# Altium PCB PCB1.PcbDoc
Units mil, origin at the board's own origin, x right, y up, seen from the top; angles counter-clockwise.
Board outline 3717.32 x 2421.26 mil, 4 copper layers (Top Layer, Layer 2, Layer 3, Bottom Layer), stack 23.756 mil thick; 38 components, 34 nets, 145 pads, 364 vias.
Unrouted connection lines stored in the file: 4.
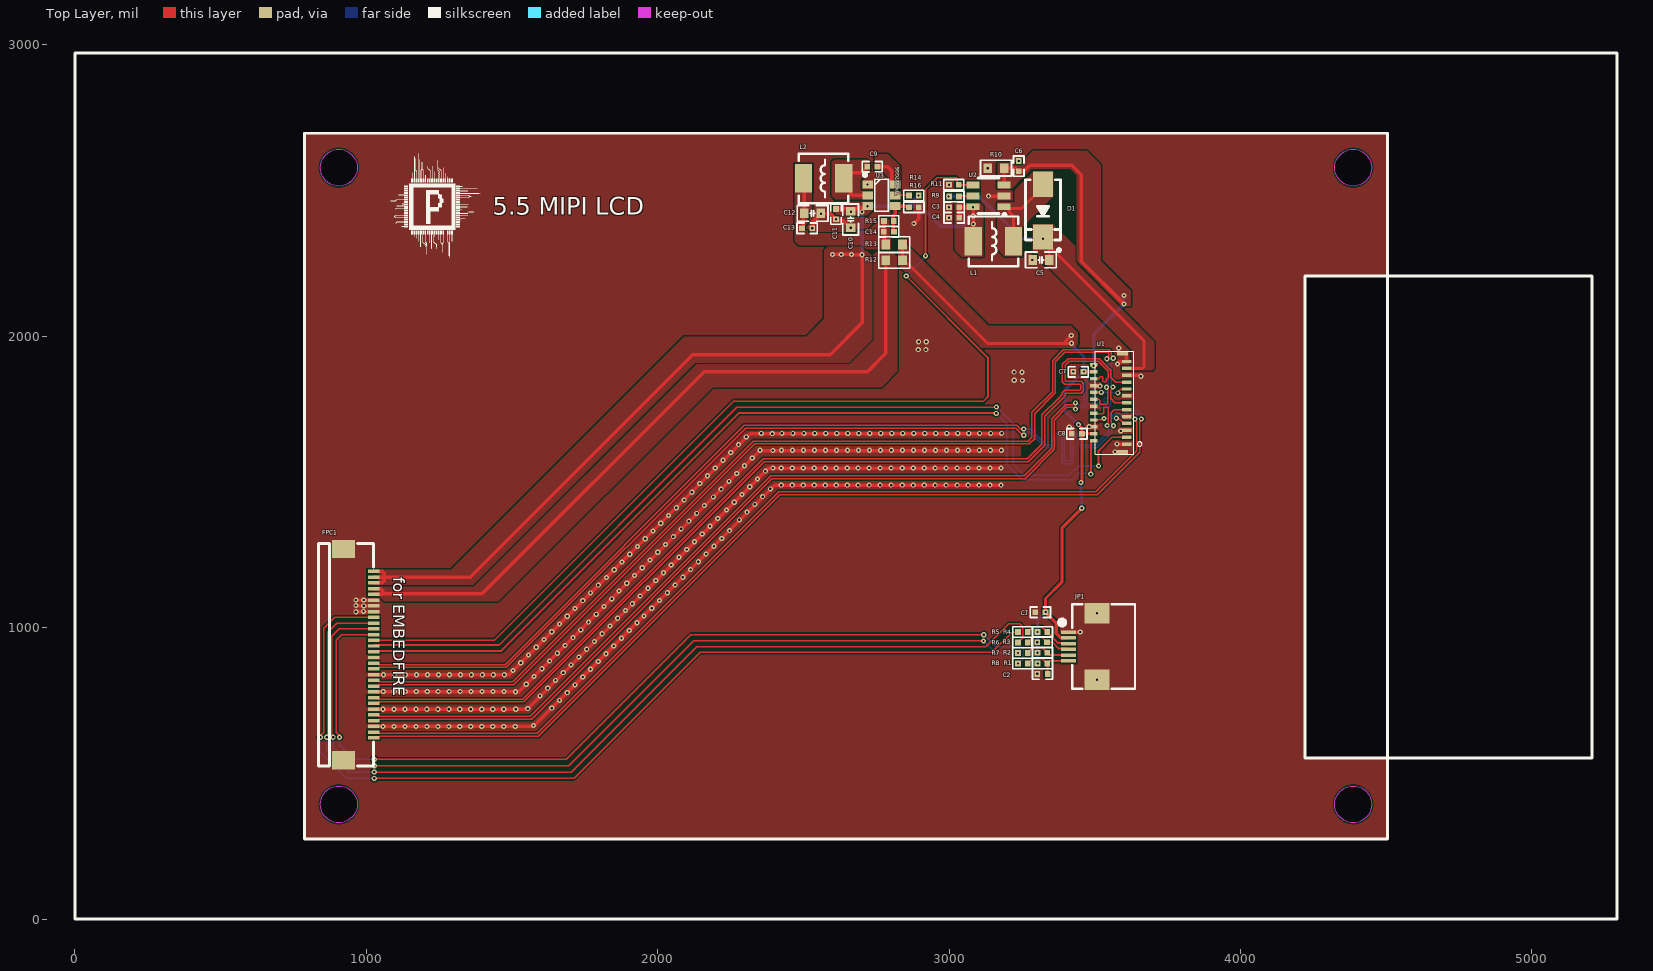
[diagram p0: Top Layer view]
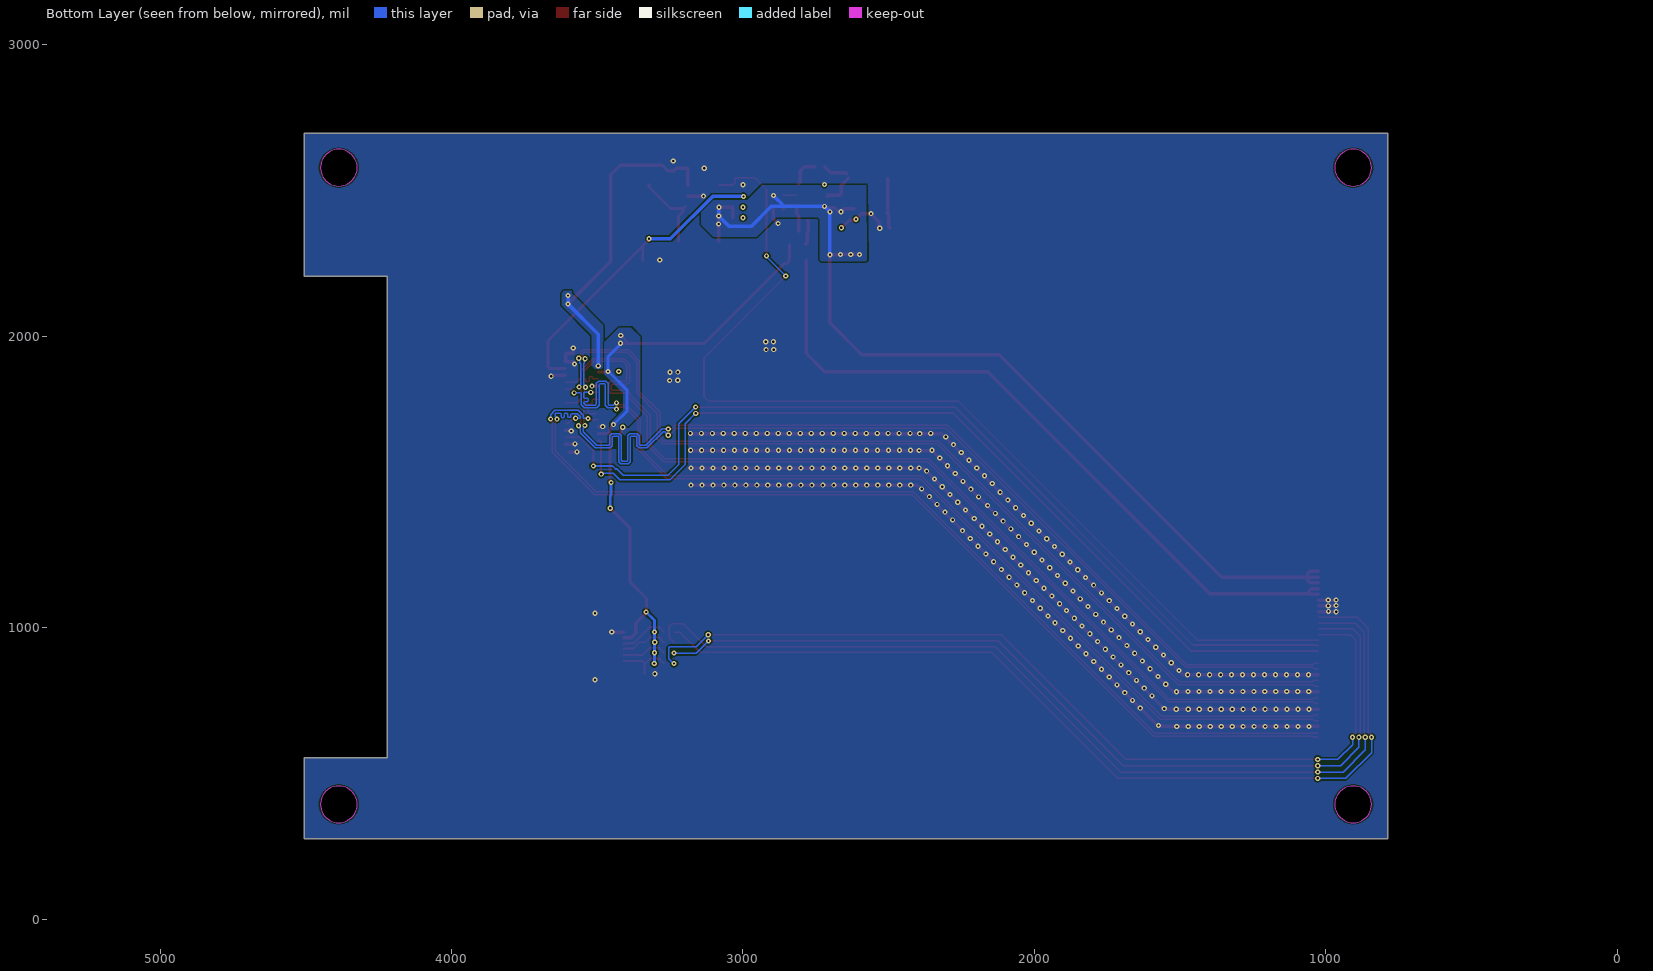
[diagram p1: Bottom Layer view, seen from below]
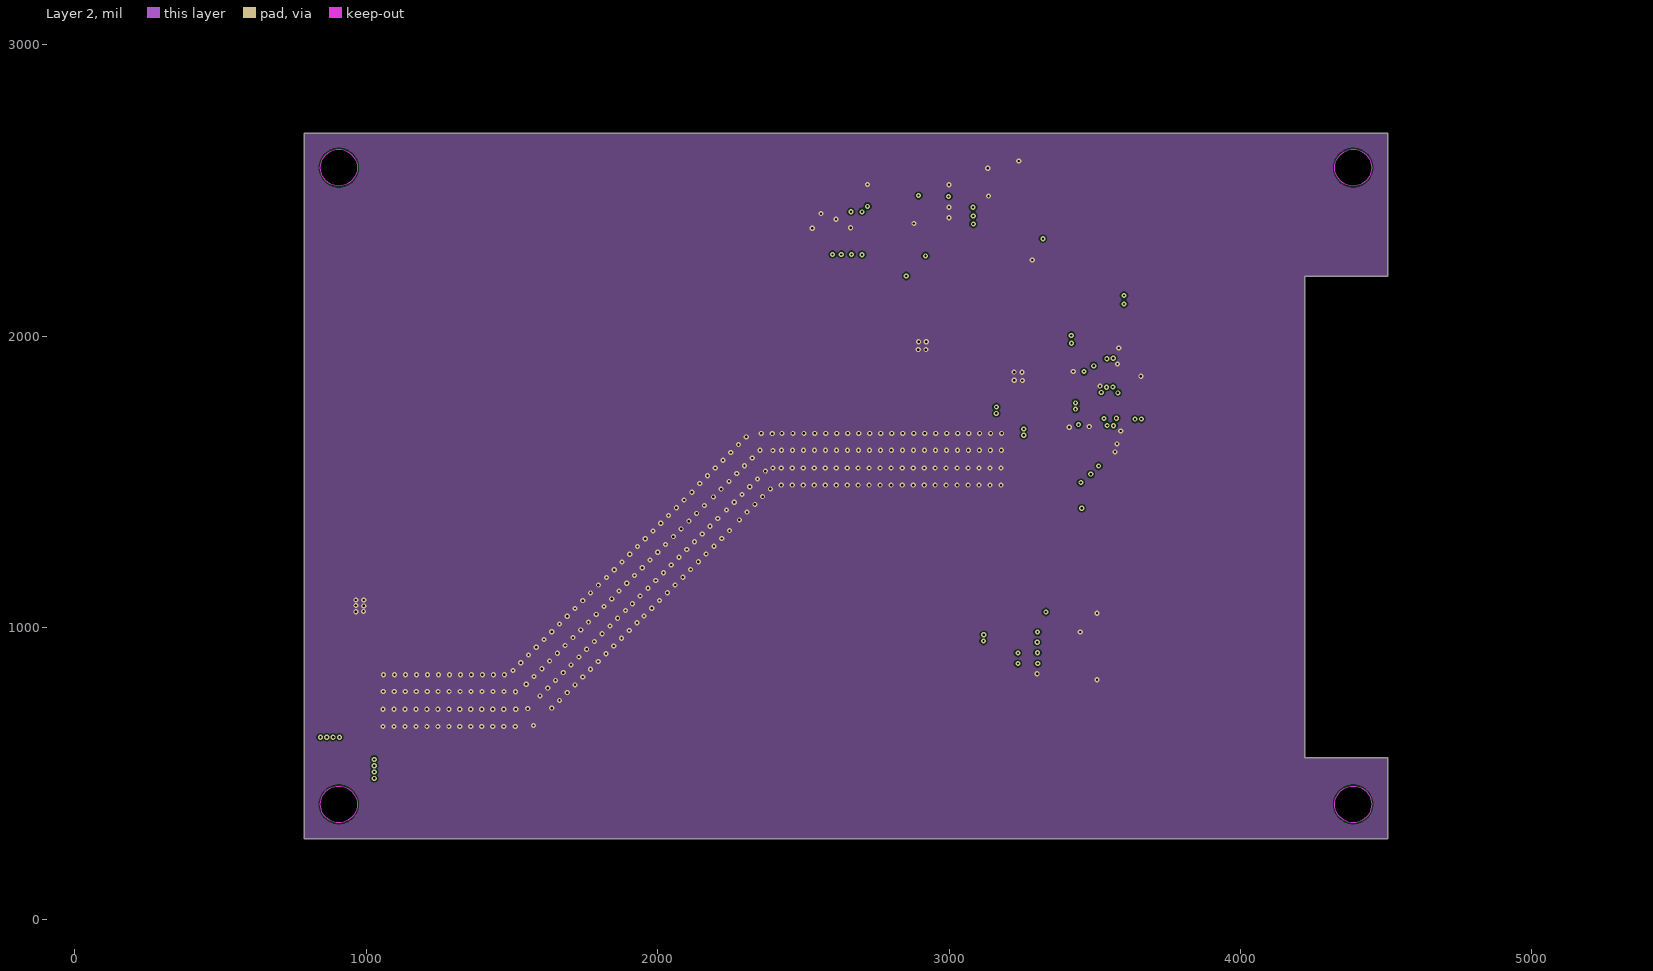
[diagram p2: Layer 2]
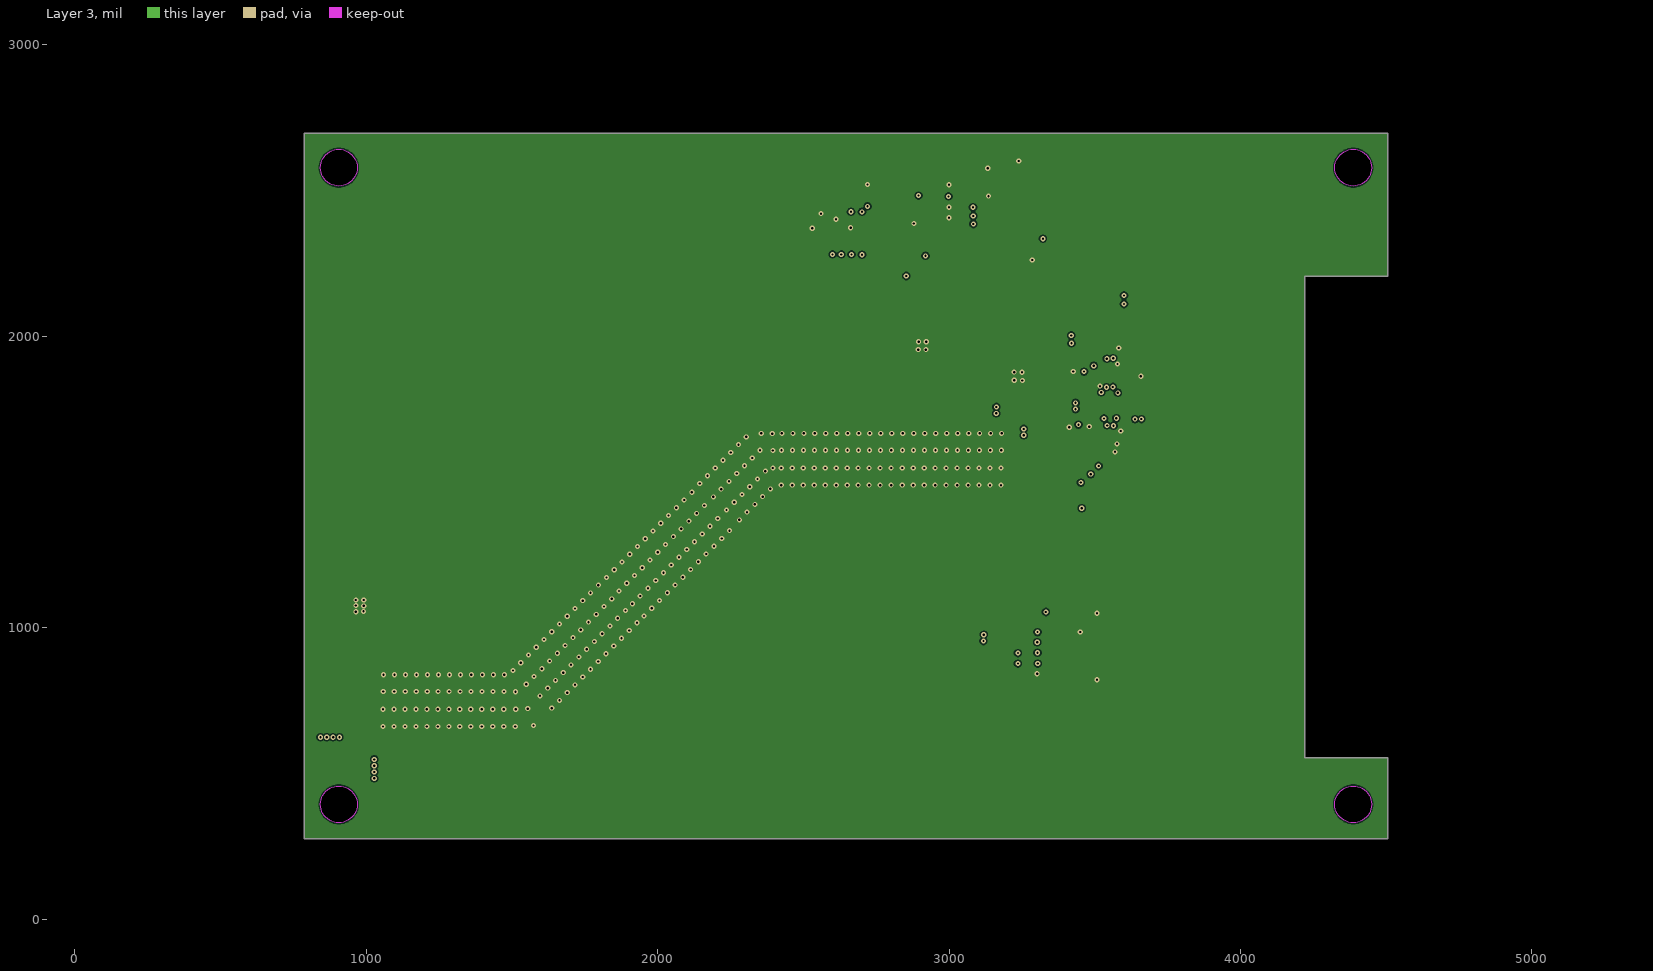
[diagram p3: Layer 3]
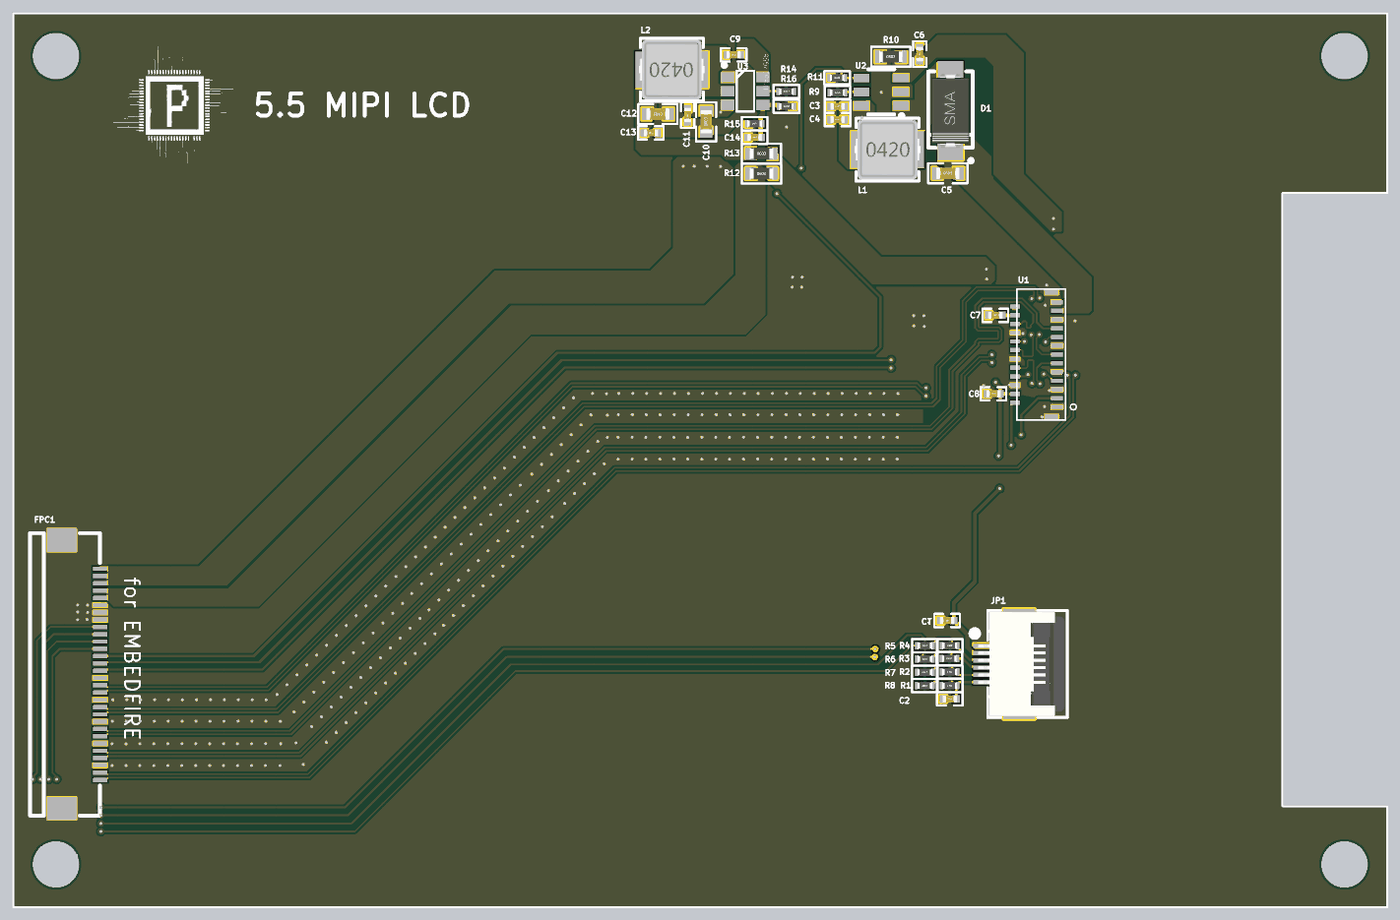
[diagram p4: 3D render of the assembled board from above, using the file's embedded part models]

## Layer stack, top to bottom
Top Solder: solder mask 0.4, Solder Resist, Dk 3.5
Top Layer: signal copper 1.4
Dielectric 4: prepreg 2.8, PP-006, Dk 4.1
Layer 2: signal copper 1.378
Dielectric 1: dielectric 12.6, FR-4, Dk 4.8
Layer 3: signal copper 1.378
Dielectric 5: prepreg 2.8, PP-006, Dk 4.1
Bottom Layer: signal copper 1.4
Bottom Solder: solder mask 0.4, Solder Resist, Dk 3.5

## Board outline
787.4,275.59 787.4,2696.85 4504.72,2696.85 4504.72,2206.69 4221.26,2206.69 4221.26,553.15 4504.72,553.15 4504.72,275.59
cut-out: 4386.61,2515.75 cw(c4386.61,2578.74) 4323.62,2578.74 cw(c4386.61,2578.74) 4386.61,2641.73 cw(c4386.61,2578.74) 4449.61,2578.74 cw(c4386.61,2578.74)
cut-out: 4386.61,330.71 cw(c4386.61,393.7) 4323.62,393.7 cw(c4386.61,393.7) 4386.61,456.69 cw(c4386.61,393.7) 4449.61,393.7 cw(c4386.61,393.7)
cut-out: 905.51,330.71 cw(c905.51,393.7) 842.52,393.7 cw(c905.51,393.7) 905.51,456.69 cw(c905.51,393.7) 968.5,393.7 cw(c905.51,393.7)
cut-out: 905.51,2515.75 cw(c905.51,2578.74) 842.52,2578.74 cw(c905.51,2578.74) 905.51,2641.73 cw(c905.51,2578.74) 968.5,2578.74 cw(c905.51,2578.74)

## Design rules (kind name [scope] priority, off if disabled: settings)
Clearance via_poly [IsVia vs InPoly] p1: gap=5 ignorepadtopadclearanceinfootprint=FALSE
Clearance poly [InPoly] p2: gap=5 ignorepadtopadclearanceinfootprint=FALSE
Clearance Clearance_all [All] p3: gap=4 ignorepadtopadclearanceinfootprint=FALSE
DiffPairsRouting 95ohm [InDifferentialPairClass('MIPI')] p1: maxlimit=8 minlimit=5 mostfreqgap=5 toplayer_minwidth=4.42 toplayer_maxwidth=4.42 toplayer_prefwidth=4.42 midlayer1_minwidth=4.42 midlayer1_maxwidth=4.42 midlayer1_prefwidth=4.42 midlayer2_minwidth=4.42 midlayer2_maxwidth=4.42 midlayer2_prefwidth=4.42 bottomlayer_minwidth=4.42 bottomlayer_maxwidth=4.42 bottomlayer_prefwidth=4.42 maxuncoupledlength=500
PlaneClearance [All] p1: clearance=7
PlaneConnect [All] p1: planeconnectstyle=Direct reliefexpansion=20 reliefentries=4 reliefconductorwidth=10 reliefairgap=10
PolygonConnect [All] p1: connectstyle=Direct reliefconductorwidth=10 reliefentries=4 polygonreliefangle="90 Angle" airgapwidth=10
RoutingVias [All] p1: holewidth=7.9 width=17.7 viastyle="Through Hole" minholewidth=7.9 minwidth=17.7 maxholewidth=7.9 maxwidth=17.7
SolderMaskExpansion [All] p1: expansion=4 istentingtop=FALSE
Width power [InNetClass('power')] p1: maxlimit=20 minlimit=10 preferedwidth=12 minimp=50.000000 maximp=50.000000 favimp=50.000000
Width [All] p2: maxlimit=14 minlimit=5 preferedwidth=6.16
27 further rules are at their usual default settings.

## Classes and differential pairs
differential pair class MIPI: 1.MIPI_DSI_CLK 2.MIPI_DSI_D0 2.MIPI_DSI_D1 3.MIPI_DSI_D2 4.MIPI_DSI_D3
net class MIPI: MIPI_DSI_CLKN MIPI_DSI_CLKP MIPI_DSI_DN0 MIPI_DSI_DN1 MIPI_DSI_DN2 MIPI_DSI_DN3 MIPI_DSI_DP0 MIPI_DSI_DP1 MIPI_DSI_DP2 MIPI_DSI_DP3
net class power: BOARD_3V3 EXT_3V3 GND LEDA LEDK VCC_3V3 VCC_5V0
differential pair 4.MIPI_DSI_D3: +MIPI_DSI_DP3 -MIPI_DSI_DN3
differential pair 3.MIPI_DSI_D2: +MIPI_DSI_DP2 -MIPI_DSI_DN2
differential pair 2.MIPI_DSI_D1: +MIPI_DSI_DP1 -MIPI_DSI_DN1
differential pair 2.MIPI_DSI_D0: +MIPI_DSI_DP0 -MIPI_DSI_DN0
differential pair 1.MIPI_DSI_CLK: +MIPI_DSI_CLKP -MIPI_DSI_CLKN

## Components (designator, comment, footprint, x,y, rotation, side; value= is the part's Value field where it differs from the comment)
C1 "0.1uf" C0402_L 3313,1053 r0 top
C2 "0.1uf" C0402_L 3320.28,841 r0 top
C3 "10uf" C0402_L 3017,2442.87 r0 top
C4 "0.1uf" C0402_L 3017,2406.87 r0 top
C5 "1uf 50V" C0603_L 3315,2262 r0 top
C6 "0.1uf" C0402_L 3239,2584 r270 top
C7 "0.1uf" C0402_L 3443.28,1878 r0 top
C8 "0.1uf" C0402_L 3438.28,1666 r0 top
C9 "0.1uf" C0402_L 2736.28,2582 r0 top
C10 "22uf" C0603_L 2662,2401 r90 top
C11 "0.1uf" C0402_L 2612,2419.28 r90 top
C12 "22uf" C0603_L 2531.54,2422 r180 top
C13 "0.1uf" C0402_L 2512.72,2371 r180 top
C14 "NC" C0402_L 2793,2359 r0 top
D1 "MBRA160T3G" SMA 3322,2431 r270 top
FPC1 "FPC-0.5FX-30PWBH15" FPC-SMD_30P-P0.50_FPC-0.5FX-30PWBH15 937.56,907.62 r270 top locked
JP1 "CON-6P" FPC0.5-WT-6P 3507.65,935.47 r270 top locked
L1 "10uH" L-SMD-0420 3152,2326 r0 top
L2 "3.3uH" L-SMD-0420 2569.1,2542 r180 top
R1 "4.7K" R0402_L 3320,877 r180 top
R2 "4.7K" R0402_L 3320,914 r180 top
R3 "4.7K" R0402_L 3319,950 r180 top
R4 "4.7K" R0402_L 3320,985 r180 top
R5 "100R" R0402_L 3253,985 r0 top
R6 "100R" R0402_L 3253,949 r0 top
R7 "0R" R0402_L 3252.73,913 r0 top
R8 "0R" R0402_L 3252.73,877 r0 top
R9 "47K" R0402_L 3016.73,2480 r180 top
R10 "7.5R" R0603_L 3161,2577 r0 top
R11 "47K" R0402_L 3016,2520 r0 top
R12 "0R" R0603_L 2811.54,2261 r0 top
R13 "NC" R0603_L 2811.46,2315 r0 top
R14 "1K" R0402_L 2878.73,2483 r0 top
R15 "100K" R0402_L 2793,2396 r0 top
R16 "30K" R0402_L 2879,2443 r0 top
U1 "FH26-25S-0.3SHW" CONN-25PIN-FH26-25S-0.3SHW 3572.87,1771.93 r90 top locked
U2 "CPC2123ST-A2" SOT-23-6_L2.9-W1.6-P0.95-LS2.8-BR 3135,2480 r0 top
U3 "TP6327GS6" SOT23_6 2767,2495 r270 top

## Footprints (in the part's own frame and the unit in brackets; to place one, negate y for a bottom-side part, rotate by r counter-clockwise, add the part's x,y. Pads: shape width x height; smd on the part's side, far side on the other; paste and mask are expansions set on the pad)
C0402_L [mm]
  rect 0.5x0.5 smd: 1(-0.45,0) 2(0.45,0)
  silkscreen extent -0.87,-0.46 0.88,0.46, body extent -0.5,-0.25 0.5,0.25, height 0.5
C0603_L [mm]
  rect 0.75x0.85 smd: 1(-0.725,0) 2(0.725,0)
  silkscreen extent -1.35,-0.69 1.35,0.69, body extent -0.8,-0.4 0.8,0.4, height 0.8
CONN-25PIN-FH26-25S-0.3SHW [mm]
  rect 0.3x0.8 smd paste+0 mask+0.051: 1(-3.6,-0.937) 3(-3,-0.937) 5(-2.4,-0.937) 7(-1.8,-0.937) 9(-1.2,-0.937) 11(-0.6,-0.937) 13(0,-0.937) 15(0.6,-0.937) 17(1.2,-0.937) 19(1.8,-0.937) 21(2.4,-0.937) 23(3,-0.937) 25(3.6,-0.937)
  rect 0.3x0.65 smd paste+0 mask+0.051: 2(-3.3,1.938) 4(-2.7,1.938) 6(-2.1,1.938) 8(-1.5,1.938) 10(-0.9,1.938) 12(-0.3,1.938) 14(0.3,1.938) 16(0.9,1.938) 18(1.5,1.938) 20(2.1,1.938) 22(2.7,1.938) 24(3.3,1.938)
  rect 0.4x0.95 smd paste+0 mask+0.051: 26(4.3,-0.563) 27(-4.3,-0.563)
  silkscreen extent -4.5,-2.26 4.5,1.81
FPC0.5-WT-6P [mm]
  rect 1.8x2.2 smd: 0(-2.9,0) 0(2.9,0)
  rect 0.3x1.3 smd: 1(-1.25,-2.497) 2(-0.75,-2.497) 3(-0.25,-2.497) 4(0.25,-2.497) 5(0.75,-2.497) 6(1.25,-2.497)
  silkscreen extent -3.67,-3.23 3.67,3.3, body extent -3.6,-2.85 3.6,3.15, height 2
FPC-SMD_30P-P0.50_FPC-0.5FX-30PWBH15 [mm]
  rect 0.3x1 smd paste+0 mask+0.051: 1(-7.25,2.221) 2(-6.75,2.221) 3(-6.25,2.221) 4(-5.75,2.221) 5(-5.25,2.221) 6(-4.75,2.221) 7(-4.25,2.221) 8(-3.75,2.221) 9(-3.25,2.221) 10(-2.75,2.221) 11(-2.25,2.221) 12(-1.75,2.221) 13(-1.25,2.221) 14(-0.75,2.221) 15(-0.25,2.221) 16(0.25,2.221) 17(0.75,2.221) 18(1.25,2.221) 19(1.75,2.221) 20(2.25,2.221) 21(2.75,2.221) 22(3.25,2.221) 23(3.75,2.221) 24(4.25,2.221) 25(4.75,2.221) 26(5.25,2.221) 27(5.75,2.221) 28(6.25,2.221) 29(6.75,2.221) 30(7.25,2.221)
  rect 1.6x2 smd paste+0 mask+0.051: 31(9.21,-0.409) 32(-9.21,-0.409)
  silkscreen extent -9.7,-2.59 9.7,2.21
L-SMD-0420 [mm]
  rect 1.5x2.5 smd: 1(-1.75,0) 2(1.75,0)
  silkscreen extent -2.16,-2.16 2.16,2.16, body extent -2.25,-2.05 2.25,2.05
R0402_L [mm]
  rect 0.5x0.5 smd: 1(-0.425,0) 2(0.425,0)
  silkscreen extent -0.88,-0.46 0.87,0.46, body extent -0.5,-0.25 0.5,0.25, height 0.3
R0603_L [mm]
  rect 0.75x0.85 smd: 1(-0.725,0) 2(0.725,0)
  silkscreen extent -1.35,-0.69 1.35,0.69, body extent -0.8,-0.4 0.8,0.4, height 0.4
SMA [mm]
  rect 2.2x1.75 smd: 1(-2.3,0) 2(2.3,0)
  silkscreen extent -2.7,-1.52 3.56,1.52, body extent -2.55,-1.3 2.55,1.3, height 2.15
SOT23_6 [mm]
  rect 0.7x0.9 smd paste+0 mask+0.051: 1(-0.671,-1.173) 2(0.279,-1.173) 3(1.229,-1.173) 4(1.229,1.226) 5(0.279,1.226) 6(-0.671,1.226)
  silkscreen extent -1.75,-1.68 1.68,0.63
SOT-23-6_L2.9-W1.6-P0.95-LS2.8-BR [mm]
  rect 1.1x0.6 smd paste+0 mask+0.051: 1(1.35,-0.899) 2(1.35,0.051) 3(1.35,1.001) 4(-1.35,1.001) 5(-1.35,0.051) 6(-1.35,-0.899)
  silkscreen extent -0.9,-1.73 1.52,1.6

## Part data
C1 C2 C3 C4 C5 C6 C7 C8 C9 C10 C11 C12 C13 C14: library part C, "贴片电容/MLCC电容"
D1: library part M7, "整流二极管"
JP1: library part "Header 6", "6P连接器"
L1 L2: library part "L-Molding Choke", "一体成型电感"
R1 R2 R3 R4 R5 R6 R7 R8 R9 R10 R11 R12 R13 R14 R15 R16: library part R, "贴片电阻"

## Via types
v1: diameter 17.7, hole 7.9, Top Layer to Bottom Layer, tented both sides, 360 vias
v2: diameter 17.7, hole 7.9, Top Layer to Bottom Layer, 4 vias

## Nets (pads, with @x,y where several pads share a name; then routed paths per layer and width w, separated by ;. In a path a pad name is that pad's centre, name@x,y a point inside that pad or via, vN(x,y) a via of type N, cw(c..) or ccw(c..) an arc to the next point about the centre after c; other vN are vias at no path point)
BOARD_3V3: C12.2 C13.2 C14.1 L2.2 R13.1 R15.1 | length 260.3
  Top Layer w12: C13.2 2498.84,2374.84 2498.84,2415.84 C12.2@2506,2423 ; C12.2 L2.2@2503,2540 ; R15.1@2777,2397 2775.78,2395.78 2775.78,2359.49 C14.1 2779.1,2355.18 2779.1,2321.9 R13.1@2785,2316
EXT_3V3: FPC1.4 FPC1.5 R12.1 | length 2464
  Top Layer w12: FPC1.5 1025.09,1114.23 1052.77,1114.23 1053,1114 1056.03,1117.03 ; FPC1.4 1049,1134 1056.03,1126.97 1056.03,1117.03 ; 1291.97,1117.03 1056.03,1117.03 ; 1292,1117 1397,1117 2159,1879 2720,1879 2783,1942 R12.1
GND: C1.1 C2.1 C3.1 C4.1 C5.1 C6.1 C7.1 C8.1 C10.1 C11.1 C12.1 C13.1 FPC1.6 FPC1.7 FPC1.8 FPC1.16 FPC1.19 FPC1.22 FPC1.25 FPC1.28 FPC1.31 FPC1.32 JP1.0 JP1.1 R10.1 R11.1 R16.2 U1.1 U1.5 U1.6 U1.9 U1.12 U1.15 U1.18 U1.21 U1.25 U1.26 U1.27 U2.2 U3.1 | length 10819.1
  Top Layer w12: v1(964,1055) 964.15,1055.15 989.15,1055.15 v1(990,1056) 990.65,1055.35 1024.91,1055.35 FPC1.8 ; v1(964,1076) 965.05,1074.95 FPC1.7 ; v1(964,1094.99) 964.36,1094.63 FPC1.6 ; FPC1.28 1573.73,661.56 2401,1488.83 v1@3178.16,1488.83 ; FPC1.25 1552.73,720.62 2380,1547.89 v1@3178.16,1547.89 ; FPC1.22 1522.67,779.67 2349.94,1606.94 3141.47,1606.94 3142.71,1608.18 3146.59,1608.18 3147.83,1606.94 3175.29,1606.94 3177.62,1609.27 v1(3179.16,1609.27) ; FPC1.19 v1(1059,838.73) 1489.56,838.73 2316.83,1666 v1(2393,1666) v1@3180.16,1666 ; C13.1@2532,2369 2534.28,2371.28 2534.28,2394.22 2560.09,2420.03 v1(2560.09,2421.02) C12.1 ; C12.1@2562,2419 2563.72,2420.72 2592.85,2420.72 v1(2612,2401.57) ; C11.1@2615,2399 2615,2398.57 2615.84,2397.72 2634.76,2397.72 2660.03,2372.46 v1(2662,2372.46) ; v1(2720,2521) 2720.38,2521 U3.1 ; v1(2879,2387) 2895.73,2403.73 R16.2 ; v1(3135,2481) 3135.5,2481.5 3187.66,2481.5 U2.2 ; v1(3285,2262) C5.1 ; v1(3302,842) 3302.57,841.43 C2.1 ; JP1.1 3449.69,984.69 v1(3450,985) ; v1(3412,1688) 3412,1686.46 3416.72,1681.73 3416.72,1669.84 C8.1 ; C7.1 3426,1878.43 v1(3426,1879) ; v1(3481,1690) 3481.75,1689.25 U1.6 ; U1.18 3498.58,1829 v1(3518,1829) ; v1(3569.32,1603.35) 3570.03,1602.64 U1.27 ; v1(3576,1631) 3576.8,1630.2 U1.1 ; v1(3578,1905) 3578,1906 3585.56,1913.56 3609.69,1913.56 U1.25 3607.82,1913.66 3607.72,1913.75 3607.72,1939.35 3605.85,1941.22 U1.26 3584.2,1941.22 3582.32,1943.09 3582.32,1959.68 v1(3582,1960) ; v1(3589,1675) 3591.44,1677.44 U1.5 ; U1.21 3654.58,1866.42 v1(3658,1863)
  other v1: 1057,661 1094.68,661 1132.37,661 1170.05,661 1207.74,661 1245.42,661 1283.11,661 1320.79,661 1358.47,661 1396.16,661 1433.84,661 1471.53,661 1510.74,661.24 1573.74,664.24 1057,720 1094.68,720 1132.37,720 1170.05,720 1207.74,720 1245.42,720 1283.11,720 1320.79,720 1358.47,720 1396.16,720 1433.84,720 1471.53,720 1512.74,720.24 1553.74,722.24 1636,724 1662.65,750.65 1596,766 1689.29,777.29 1511.74,780.24 1058,781 1095.68,781 1133.37,781 1171.05,781 1208.74,781 1246.42,781 1284.11,781 1321.79,781 1359.47,781 1397.16,781 1434.84,781 1472.53,781 1622.65,792.65 1715.94,803.94 1549,806 1649.29,819.29 3507.65,821.3 1742.59,830.59 1575.65,832.65 1096.68,838.73 1134.37,838.73 1172.05,838.73 1209.74,838.73 1247.42,838.73 1285.11,838.73 1322.79,838.73 1360.47,838.73 1398.16,838.73 1435.84,838.73 1473.53,838.73 1675.94,845.94 1503,853 1769.23,857.23 1602.29,859.29 1702.59,872.59 1529.65,879.65 1795.88,883.88 1628.94,885.94 1729.23,899.23 1556.29,906.29 1822.53,910.53 1655.59,912.59 1755.88,925.88 1582.94,932.94 1849.17,937.17 1682.23,939.23 1782.53,952.53 1609.59,959.59 1875.82,963.82 1708.88,965.88 1809.17,979.17 1636.23,986.23 1902.47,990.47 1735.53,992.53 1835.82,1005.82 1662.88,1012.88 1929.11,1017.11 1762.17,1019.17 1862.47,1032.47 1689.53,1039.53 1953,1040 1788.82,1045.82 3507.65,1049.65 1889.11,1059.11 1716.17,1066.17 1979.65,1066.65 1815.47,1072.47 991,1075 1913,1082 1742.82,1092.82 2006.29,1093.29 991,1095 1842.11,1099.11 1939.65,1108.65 1769.47,1119.47 2032.94,1119.94 1867,1126 1966.29,1135.29 1796.11,1146.11 2059.59,1146.59 1893.65,1152.65 1992.94,1161.94 1824,1172 2086.23,1173.23 1920.29,1179.29 2019.59,1188.59 1850.65,1198.65 2112.88,1199.88 1946.94,1205.94 2046.23,1215.23 1877.29,1225.29 2139.53,1226.53 1973.59,1232.59 2072.88,1241.88 1903.94,1251.94 2166.17,1253.17 2000.23,1259.23 2099.53,1268.53 1930.59,1278.59 2192.82,1279.82 2026.88,1285.88 2126.17,1295.17 1957.23,1305.23 2219.47,1306.47 2053.53,1312.53 2152.82,1321.82 1983.88,1331.88 2246.11,1333.11 2080.17,1339.17 2179.47,1348.47 2010.53,1358.53 2106.82,1365.82 2280,1370 2206.11,1375.11 2037.17,1385.17 2133.47,1392.47 2306.65,1396.65 2236,1404 2063.82,1411.82 2160.11,1419.11 2333.29,1423.29 2262.65,1430.65 2090.47,1438.47 2191,1449 2359.94,1449.94 2289.29,1457.29 2117.11,1465.11 2217.65,1475.65 2386.59,1476.59 2315.94,1483.94 2424,1489.27 2461.68,1489.27 2499.37,1489.27 2537.05,1489.27 2574.74,1489.27 2612.42,1489.27 2650.11,1489.27 2687.79,1489.27 2725.47,1489.27 2763.16,1489.27 2800.84,1489.27 2839,1489.27 2876.68,1489.27 2914.37,1489.27 2952.05,1489.27 2989.74,1489.27 3027.42,1489.27 3065.11,1489.27 3102.79,1489.27 3140.47,1489.27 3178.16,1489.27 2144,1495 2244.29,1502.29 2342.59,1510.59 2170.65,1521.65 2270.94,1528.94 2369.23,1537.23 2197.29,1548.29 2395,1548 2424,1548.27 2461.68,1548.27 2499.37,1548.27 2537.05,1548.27 2574.74,1548.27 2612.42,1548.27 2650.11,1548.27 2687.79,1548.27 2725.47,1548.27 2763.16,1548.27 2800.84,1548.27 2839,1548.27 2876.68,1548.27 2914.37,1548.27 2952.05,1548.27 2989.74,1548.27 3027.42,1548.27 3065.11,1548.27 3102.79,1548.27 3140.47,1548.27 3178.16,1548.27 2297.59,1555.59 2223.94,1574.94 2324.23,1582.23 2250.59,1601.59 2395,1608 2350.88,1608.88 2425,1609.27 2462.68,1609.27 2500.37,1609.27 2538.05,1609.27 2575.74,1609.27 2613.42,1609.27 2651.11,1609.27 2688.79,1609.27 2726.47,1609.27 2764.16,1609.27 2801.84,1609.27 2840,1609.27 2877.68,1609.27 2915.37,1609.27 2953.05,1609.27 2990.74,1609.27 3028.42,1609.27 3066.11,1609.27 3103.79,1609.27 3141.47,1609.27 2277.23,1628.23 2303.88,1654.88 2355,1667 2426,1667 2463.68,1667 2501.37,1667 2539.05,1667 2576.74,1667 2614.42,1667 2652.11,1667 2689.79,1667 2727.47,1667 2765.16,1667 2802.84,1667 2841,1667 2878.68,1667 2916.37,1667 2954.05,1667 2991.74,1667 3029.42,1667 3067.11,1667 3104.79,1667 3142.47,1667 3180.16,1667 3251.22,1848.23 3223.22,1849.23 3223,1877 3250.28,1876.92 2894.22,1954.23 2920.22,1954.23 2895.22,1981.23 2921.22,1981.23 2530.43,2371 2999.28,2406.87 2999.28,2442.87 2999.27,2520 3132.46,2577 3239,2601.72
LCD_BL_PWM: FPC1.13 R11.2 U2.4 | length 3508
  Top Layer w6.16: FPC1.13 1439.84,956.84 2260,1777 3118,1777 3133,1792 3133,1927 v1(2853,2207) ; v1(2919,2276) 2919,2504 2959,2544 3024.39,2544 3028,2540.39 3028,2524.73 R11.2 3033.34,2519.39 U2.4
  Bottom Layer w6.16: v1(2853,2207) 2919,2273 v1(2919,2276)
LCD_RESET: FPC1.15 U1.2 | length 3111.1
  Top Layer w6.16: FPC1.15 1028.08,920.55 1463.38,920.55 2279.83,1737 3160.16,1737 v1(3161.59,1735.58) ; v1(3486,1527) 3486.88,1527.88 3486.88,1639.18 3489.7,1642.01 U1.2
  Bottom Layer w6.16: v1(3161.59,1735.58) 3162.41,1735.58 3198,1699.99 3198,1560 3250,1508 3423,1508 3445,1530 3483,1530 v1(3486,1527)
LCD_TE: FPC1.14 U1.3 | length 3188.9
  Top Layer w6.16: FPC1.14 1028.08,940.23 1455.23,940.23 2271.68,1756.68 3160.99,1756.68 v1(3162,1757.69) ; v1(3513,1555) 3513,1608 3558.82,1653.82 U1.3
  Bottom Layer w6.16: v1(3162,1757.69) 3220,1699.69 3220,1560 3257,1523 3411,1523 3433,1545 3437,1545 3447,1555 v1(3513,1555)
LEDA: C5.2 D1.2 R9.2 U1.23 | length 1080.6
  Top Layer w10: v1(3322,2335) 3322,2331.59 D1.2@3343.54,2310.05 ; C5.2 D1.2@3343.54,2310.05 ; U1.23@3609,1890 3609.87,1889.13 3663.14,1889.13 3669,1894.99 3669,1984.59 D1.2@3343.54,2310.05
  Top Layer w12: v1(2998,2480) R9.2
  Bottom Layer w12: v1(2998,2480) 3104,2480 3249,2335 v1(3322,2335)
LEDK: C6.2 R10.2 U1.24 U2.3 | length 1140.2
  Top Layer w12: U2.3 3189.54,2520.78 R10.2 3228.28,2577 C6.2@3238.64,2566.64 ; C6.2 3240.93,2568.21 3258.21,2568.21 3277,2587 3421,2587 3453,2555 3453,2258 v1(3600,2111) ; v1(3496.26,1898.54) 3496.59,1898.87 U1.24
  Bottom Layer w12: v1(3496.26,1898.54) 3496.26,2007.26 v1(3600,2111) v1(3600,2140)
MIPI_DSI_CLKN: FPC1.24 U1.20 | length 3352.1
  Top Layer w4.42: FPC1.24 1038.78,740.3 1043.91,745.43 1540.87,745.43 2365.43,1570 3271.32,1570 3327.69,1626.37 3327.69,1726.37 3389.32,1788 3398,1796.68 3398,1802.59 3400.59,1805.18 3452.61,1805.18 3460.27,1812.84 3460.27,1837.78 3452.61,1845.44 3400.59,1845.44 3398,1848.03 3398,1853 3398,1900 3411.96,1913.96 3491.44,1913.96 3491.54,1914.06 3501.65,1914.06 3501.74,1913.96 3511.96,1913.96 3545.58,1880.35 3545.58,1857.58 3543.93,1855.93 3542.61,1854.61 3541.72,1854.61 3539.13,1852.02 3539.13,1846.42 3536.85,1844.14 3530,1844.14 3527.71,1846.42 3527.71,1859.43 3525.43,1861.71 3518.58,1861.71 3516.29,1859.43 3516.29,1857.2 3513.7,1854.61 3507.9,1854.61 U1.20
MIPI_DSI_CLKP: FPC1.23 U1.19 | length 3350.8
  Top Layer w4.42: FPC1.23 1038.78,759.99 1043.91,754.86 1536.97,754.86 2361.53,1579.42 3267.42,1579.42 3318.27,1630.27 3318.27,1730.27 3376,1788 3388.58,1800.58 3388.58,1806.49 3396.69,1814.6 3448.7,1814.6 3450.85,1816.74 3450.85,1833.88 3448.7,1836.02 3396.69,1836.02 3388.58,1844.13 3388.58,1853 3388.58,1903.9 3408.06,1923.38 3487.54,1923.38 3487.63,1923.48 3505.55,1923.48 3505.65,1923.38 3515.86,1923.38 3555,1884.25 3555,1859 3571.2,1842.8 U1.19
MIPI_DSI_DN0: FPC1.27 U1.17 | length 3296.8
  Top Layer w4.42: FPC1.27 1038.78,681.25 1043.88,686.35 1566.84,686.35 2392.07,1511.58 3260.9,1511.58 3361,1611.68 3361,1712.68 3404.45,1756.13 3424.77,1756.13 3430.91,1749.99 v1(3434,1749.99) ; v1(3579,1806) 3579,1808.45 3589.72,1819.17 U1.17
  Bottom Layer w4.42: v1(3434,1749.99) 3437.59,1749.99 3442.47,1754.87 3455,1754.87 3463.87,1754.87 3471.98,1762.97 3471.98,1834.65 3474.12,1836.8 3491.26,1836.8 3493.4,1834.65 3493.4,1762.97 3501.51,1754.87 3527.11,1754.87 3544.12,1754.87 3555.18,1765.93 3555.18,1804.25 3557.77,1806.84 3578.16,1806.84 v1(3579,1806)
MIPI_DSI_DN1: FPC1.21 U1.14 | length 3355.5
  Top Layer w4.42: FPC1.21 1038.78,799.36 1043.91,804.49 1505.81,804.49 2332.32,1631 3275.32,1631 3293.42,1649.1 3293.42,1735.1 3364.42,1806.1 3364.42,1913.1 3396.18,1944.85 3544.89,1944.85 3547.48,1942.26 3547.48,1932.37 3541.38,1926.27 v1(3541.38,1923.14) ; U1.14 3514.41,1783.74 3517,1781.15 3517,1769.59 3519.59,1767 3542,1767 3544.59,1769.59 3544.59,1817.54 3540.31,1821.82 v1(3540.31,1825.41)
  Bottom Layer w4.42: v1(3540.31,1825.41) 3540.31,1828.51 3546.44,1834.64 3546.44,1905.45 3543.92,1907.98 3543.92,1920.6 v1(3541.38,1923.14)
MIPI_DSI_DN2: FPC1.18 U1.11 | length 3306
  Top Layer w4.42: FPC1.18 1038.78,858.41 1043.91,863.55 1479.87,863.55 2301.32,1685 3228.21,1685 3252.91,1660.3 v1(3256,1660.3) ; v1(3564,1693) 3564,1694.23 3556,1702.23 3556,1737 3567.31,1748.31 3599.69,1748.31 U1.11@3602,1746
  Bottom Layer w4.42: v1(3256,1660.3) 3268.51,1672.81 3273.19,1672.81 3329,1617 3347.37,1617 3356.24,1617 3364.35,1625.11 3364.35,1654.86 3366.49,1657 3383.63,1657 3385.77,1654.86 3385.77,1570.35 3393.43,1562.69 3418.37,1562.69 3426.03,1570.35 3426.03,1654.86 3428.17,1657 3445.31,1657 3447.45,1654.86 3447.45,1625.11 3455.55,1617 3472,1617 3506,1617 3557.87,1668.87 3557.87,1683.77 3564,1689.9 v1(3564,1693)
MIPI_DSI_DN3: FPC1.30 U1.8 | length 3353.1
  Top Layer w4.42: FPC1.30 1028.7,625.89 1044.54,625.89 1046.9,628.24 1590.73,628.24 2419.07,1456.58 3507.58,1456.58 3653.6,1602.6 3653.6,1706.78 3659.73,1712.92 v1(3659.73,1716.01) ; U1.8 3524.28,1712.87 3529.41,1718 v1(3531.52,1718)
  Bottom Layer w4.42: v1(3531.52,1718) 3532.02,1718.5 3545.46,1718.5 3548.05,1721.09 3548.05,1728.65 3564.89,1745.49 3645.89,1745.49 3659.73,1731.65 v1(3659.73,1716.01)
MIPI_DSI_DP0: FPC1.26 U1.16 | length 3295
  Top Layer w4.42: FPC1.26 1038.78,700.93 1043.94,695.77 1562.94,695.77 2388.17,1521 3257,1521 3351.58,1615.58 3351.58,1716.58 3400.55,1765.55 3424.77,1765.55 3430.91,1771.69 v1(3434,1771.69) ; U1.16 3496.91,1807.68 v1(3521.95,1807.66)
  Bottom Layer w4.42: v1(3434,1771.69) 3437.09,1771.69 3444.49,1764.29 3455,1764.29 3459.97,1764.29 3462.56,1766.88 3462.56,1838.56 3470.22,1846.22 3495.16,1846.22 3502.82,1838.56 3502.82,1766.88 3505.41,1764.29 3527.11,1764.29 3540.22,1764.29 3542.99,1767.06 3545.43,1769.5 3545.43,1773.16 3542.84,1775.75 3532.5,1775.75 3530.22,1778.04 3530.22,1784.89 3532.5,1787.17 3543.17,1787.17 3545.76,1789.76 3545.76,1803.39 3545.76,1804.25 3542.33,1807.68 v1(3521.95,1807.66)
MIPI_DSI_DP1: FPC1.20 U1.13 | length 3355.3
  Top Layer w4.42: FPC1.20 1038.78,819.04 1043.91,813.91 1501.91,813.91 2328.42,1640.42 3271.42,1640.42 3284,1653 3284,1739 3355,1810 3355,1917 3392.27,1954.27 3548.79,1954.27 3556.9,1946.17 3556.9,1934.23 3563,1928.13 v1(3563,1925) ; v1(3562,1826) 3562,1822.91 3554.01,1814.92 3554.01,1786.99 3569.07,1771.93 U1.13
  Bottom Layer w4.42: v1(3562,1826) 3562,1829.09 3555.86,1835.23 3555.86,1905.45 3560.46,1910.05 3560.46,1922.46 v1(3563,1925)
MIPI_DSI_DP2: FPC1.17 U1.10 | length 3308.7
  Top Layer w4.42: FPC1.17 1038.78,878.1 1043.91,872.97 1475.97,872.97 2297.42,1694.42 3232.11,1694.42 3243.74,1682.79 3255.21,1682.79 v1(3256,1682) ; U1.10@3503,1737 3505,1735 3527,1735 3530,1738 3530,1754.41 3532.59,1757 3543.99,1757 3546.58,1754.41 3546.58,1701.98 3542.33,1697.73 v1(3542.33,1694.14)
  Bottom Layer w4.42: v1(3256,1682) 3256.23,1682.23 3277.09,1682.23 3332.9,1626.42 3347.37,1626.42 3352.34,1626.42 3354.93,1629.01 3354.93,1658.76 3362.59,1666.42 3387.53,1666.42 3395.19,1658.76 3395.19,1574.25 3397.33,1572.11 3414.47,1572.11 3416.61,1574.25 3416.61,1658.76 3424.27,1666.42 3449.21,1666.42 3456.87,1658.76 3456.87,1629.01 3459.46,1626.42 3472,1626.42 3502.1,1626.42 3548.45,1672.78 3548.45,1684.91 3542.33,1691.04 v1(3542.33,1694.14)
MIPI_DSI_DP3: FPC1.29 U1.7 | length 3359.4
  Top Layer w4.42: FPC1.29 1028.7,638.18 1044.54,638.18 1045.06,637.66 1586.83,637.66 2415.17,1466 3503.68,1466 3644.18,1606.5 3644.18,1706.6 3638.04,1712.74 v1(3638.04,1715.83) ; v1(3574,1719) 3576.54,1716.46 3584.54,1716.46 3599.94,1701.06 U1.7
  Bottom Layer w4.42: v1@3577,1719 3576.5,1718.5 3560.06,1718.5 3557.47,1721.09 3557.47,1724.75 3567.72,1735 3587.41,1735 3590,1732.41 3590,1724.59 3592.59,1722 3598.41,1722 3601,1724.59 3601,1733.41 3603.59,1736 3610.41,1736 3613,1733.41 3613,1723.64 3615.59,1721.06 3621.41,1721.06 3624,1723.64 3624,1733.48 3626.59,1736.07 3641.99,1736.07 3644.58,1733.48 3644.58,1725.96 3638.04,1719.42 v1(3638.04,1715.83)
NetC2_2: C2.2 JP1.6 R1.1 R8.2 | length 194.3
  Top Layer w6.16: R8.2 3286.39,893.92 3319.81,893.92 R1.1 ; C2.2 3338,875.73 R1.1 ; JP1.6 3345.99,886.26 R1.1
NetC9_1: C9.1 L2.1 U3.2 | length 201.1
  Top Layer w12: L2.1 2661.53,2518.47 2661.53,2490.92 2668.56,2483.89 2709.08,2483.89 2709.08,2480.92 U3.2@2710,2480 ; L2.1@2643,2558 2646.19,2561.19 2697.75,2561.19 C9.1
NetC9_2: C9.2 U3.6 | length 101.4
  Top Layer w12: C9.2 2789,2582 2803.56,2567.44 2803.56,2529.2 2808.76,2524 U3.6@2809,2524
NetC14_2: C14.2 R15.2 R16.1 U3.4 | length 138.9
  Top Layer w12: C14.2@2808,2361 2809,2362 2809,2415 2815.28,2421.28 U3.4 2853.38,2446.62 R16.1@2862,2438
NetD1_1: D1.1 L1.2 U2.1 | length 285.9
  Top Layer w10: U2.1@3198,2444.6 U2.1@3203.59,2439 ; L1.2 3220.9,2411.85 3204.81,2427.94 3204.81,2437.78 U2.1@3203.59,2439 ; D1.1 3322,2512.69 3248.31,2439 U2.1@3203.59,2439
NetJP1_3: JP1.3 R4.1 R5.2 | length 170.1
  Top Layer w6.16: R5.2 3286.66,1001.92 3319.81,1001.92 R4.1 3374.52,947.22 3386.84,947.22 3388.74,945.32 JP1.3
NetJP1_4: JP1.4 R3.1 R6.2 | length 164.1
  Top Layer w6.16: R6.2 3287.66,966.92 3318.81,966.92 R3.1 3354.81,950 3376.36,928.46 3406.52,928.46 JP1.4
NetJP1_5: JP1.5 R2.1 R7.2 | length 157.7
  Top Layer w6.16: R7.2 3287.39,930.92 3319.81,930.92 R2.1 3344.79,905.94 JP1.5
NetR9_1: R9.1 U2.5 | length 49.2
  Top Layer w6.16: R9.1 3035.46,2481.99 U2.5
NetR14_1: R14.1 U3.5 | length 46.1
  Top Layer w6.16: U3.5 2860.02,2484.02 R14.1@2861,2485
TP_INT: FPC1.11 R7.1 | length 3108.6
  Top Layer w5: v1(885.89,624) 882,627.89 882,970.85 907.36,996.21 FPC1.11 ; v1(1027,526.3) 1694.99,526.3 2123.69,955 3117.05,955 v2(3117.71,954.34)
  Bottom Layer w5: v1(885.89,624) 885.89,589.42 949.01,526.3 v1(1027,526.3) ; v2(3117.71,954.34) 3118.41,954.34 3160.75,912 3235,912 v2(3236,913)
TP_RST: FPC1.12 R8.1 | length 3127.8
  Top Layer w5: v1(907.59,624) 907.59,630.33 895.92,642 895.92,956.92 915.52,976.52 FPC1.12 ; v1(1027,548) 1686,548 2114,976 v2(3119,976)
  Bottom Layer w5: v1(907.59,624) 907.59,598.41 958,548 v1(1027,548) ; v2(3119,976) 3160,935 3251,935 3255,931 3255,894 3238,877 v2(3236,877)
TP_SCL: FPC1.9 R5.1 | length 3256.6
  Top Layer w5: v1(842.49,624) 842.49,630.33 854.16,642 854.16,998.68 891.06,1035.58 FPC1.9 ; v1(1027,482.9) 1712.97,482.9 2146.07,916 3147,916 3216,985 R5.1
  Bottom Layer w5: v1(842.49,624) 842.49,571.44 931.03,482.9 v1(1027,482.9)
TP_SDA: FPC1.10 R6.1 | length 3271.6
  Top Layer w5: v1(864.19,624) 868.08,627.89 868.08,984.76 899.21,1015.89 FPC1.10 ; v1(1027,504.6) 1703.98,504.6 2133.72,934.34 3125.66,934.34 3204.31,1013 3243,1013 3253,1003 3253,965.73 R6.1
  Bottom Layer w5: v1(864.19,624) 864.19,580.43 940.02,504.6 v1(1027,504.6)
VCC_3V3: C1.2 C7.2 C8.2 JP1.2 R1.2 R2.2 R3.2 R4.2 R12.2 R13.2 U1.4 U1.22 | length 2249.2
  Top Layer w10: R13.2 R13.2 R12.2@2840.04,2267 ; R12.2@2841,2267 2841,2258.12 2849.85,2249.27 2858.73,2249.27 3132,1976 3392,1976 ; R1.2@3298.43,871.43 3298.43,872.16 R1.2 ; v1(3332,1054) 3330.72,1055.28 3330.72,1100.72 3388,1158 3388,1343 v1(3455,1410) ; v1(3419,2003) 3392,1976 ; v1(3420,1976) 3392,1976 ; v1(3444,1697) 3456,1685 C8.2 ; v1(3452,1498) 3456,1502 C8.2 ; C7.2@3463,1878.11 3496.48,1878.11 U1.22 ; U1.4 3496.41,1665.81 3456.19,1665.81 C8.2 ; R1.2 v1(3304,877) R1.2
  Top Layer w12: v1(3332,1054) 3332,1051.72 3368,1015.72 3368,980.39 3383.3,965.09 3409.25,965.09 JP1.2
  Bottom Layer w10: v1@3303.27,875 v1(3303.27,914) v1(3303.27,985) 3303.27,1025.27 v1(3332,1054) ; v1(3420,1976) 3420,1973 3463,1930 v1(3463,1879) 3461,1879 3397,1815 3397,1744 v1(3444,1697) ; v1(3452,1498) 3452,1454.76 3455,1451.76 v1(3455,1410)
  other v1: 3302.27,950
VCC_5V0: C3.2 C4.2 C10.2 C11.2 FPC1.1 FPC1.2 FPC1.3 L1.1 R14.2 U2.6 U3.3 | length 3433.2
  Top Layer w12: FPC1.3 1025.09,1153.78 1055.06,1153.78 1062,1160.72 1062,1173.38 ; FPC1.2 1061.99,1173.37 ; FPC1.1 1054.97,1193.06 1062,1186.03 1062,1173.38 ; v1(2600,2281) v1(2630,2281) v1(2665,2281) 2665.5,2280.5 2700.5,2280.5 v1(2701,2280) 2701,2046 2592,1937 2120,1937 1356.38,1173.38 1062,1173.38 ; C11.2@2618,2438 2653.54,2438 C10.2 ; C10.2@2675,2431 2685.08,2441.08 U3.3@2715.27,2441.08 ; C4.2 C3.2 3035.58,2443.73 U2.6@3080.99,2443.73 ; U2.6@3081.85,2443 3083,2441.85 3083,2326.1 L1.1
  Bottom Layer w12: v1(2701,2280) v1(2701,2427) v1(2720,2446) 2858,2446 ; v1(2895,2483) 2858,2446 ; v1(3082,2443) 3082.5,2442.5 3082.5,2413.5 v1(3083,2413) 3047,2377 2971,2377 2902,2446 2858,2446
  other v1: 3083.22,2385.23 2663.22,2427.23

## Polygon pours and split planes (outlines as drawn)
GND on Top Layer "GND_L01_P021" (solid, remove dead copper, pour order 21): 787,275 4505,275 4505,2697 787,2697
LEDA on Top Layer "LEDA_L01_P019" (solid, remove dead copper, pour order 19): 3287,2385 3356,2385 3438,2303 3438,2247 3704,1981 3704,1890 3697,1883 3624,1883 3624,1895 3626,1897 3626,1954 3292,2288 3287,2288
EXT_3V3 on Top Layer "EXT_3V3_L01_P013" (solid, remove dead copper, pour order 13): 1369,1140 2137,1908 2658,1908 2742,1992 2740.28,1993.72 2740.28,2280.28 2750,2290 2804,2290 2822,2272 2822,1880 2768,1826 2188,1826 1453,1091 1061,1091 1042,1110 1042,1140
GND on Top Layer "GND_L01_P020" (solid, remove dead copper, pour order 20): 1008,1100 1005,1103 957,1103 953,1099 953,1050 959,1044 1003,1044 1007,1048
LEDK on Top Layer "LEDK_L01_P018" (solid, remove dead copper, pour order 18): 3593,2104 3438,2259 3438,2552 3415,2575 3283,2575 3249,2541 3230,2541 3230,2575.28 3228.28,2577 3264,2612.72 3264,2614 3265,2614 3287,2636 3472,2636 3520,2588 3520,2260 3623,2157 3623,2104
VCC_3V3 on Top Layer "VCC_3V3_L01_P015" (solid, remove dead copper, pour order 15): 2825,2333 2825,2245 3109,1961 3430,1961 3442,1973 3442,2012 3418,2036 3135,2036 2855,2316 2855,2332
VCC_5V0 on Top Layer "VCC_5V0_L01_P012" (solid, remove dead copper, pour order 12): 1044,1199 1291,1199 2091,1999 2510,1999 2572,2061 2572,2295 2588,2311 2700,2311 2736,2275 2736,1989 2657,1910 2129,1910 1367,1148 1043,1148
BOARD_3V3 on Top Layer "BOARD_3V3_L01_P011" (solid, remove dead copper, pour order 11): 2505,2379 2505,2362 2721,2362 2765,2406 2787,2406 2799,2394 2799,2298 2716,2298 2702,2312 2486,2312 2471,2327 2471,2376
NetC9_2 on Top Layer "NETC9_2_L01_P009" (solid, remove dead copper, pour order 9): 2744,2573 2764,2573 2798,2539 2798,2508 2832,2508 2832,2583 2790,2625 2745,2625
NetC9_1 on Top Layer "NETC9_1_L01_P008" (solid, remove dead copper, pour order 8): 2738,2498 2701,2498 2695,2504 2695,2537 2696,2537 2728,2569 2728,2595 2717,2606 2605,2606 2597,2598 2597,2482 2609,2470 2738,2470
BOARD_3V3 on Top Layer "BOARD_3V3_L01_P006" (solid, remove dead copper, pour order 6): 2471,2591 2471,2376 2485,2362 2505,2362 2505,2379 2529,2403 2529,2590 2528,2591
GND on Top Layer "GND_L01_P005" (solid, remove dead copper, pour order 5): 2678,2359 2523,2359 2520,2362 2521,2363 2521,2427 2533,2427 2545,2439 2591,2439 2618,2412 2679,2412
VCC_5V0 on Top Layer "VCC_5V0_L01_P004" (solid, remove dead copper, pour order 4): 2738,2434 2719,2415 2615,2415 2602,2428 2602,2453 2610,2461 2738,2461
LEDK on Top Layer "LEDK_L01_P003" (solid, remove dead copper, pour order 3): 3166,2508 3216,2508 3250,2542 3250,2576 3231,2595 3166,2595
LEDA on Top Layer "LEDA_L01_P002" (solid, remove dead copper, pour order 2): 3287,2385 3287,2288 3330,2245 3359,2245 3359,2382 3357,2384
NetD1_1 on Top Layer "NETD1_1_L01_P001" (solid, remove dead copper, pour order 1): 3165,2300 3190,2275 3251,2275 3251,2375 3357,2481 3357,2565 3288,2565 3225,2502 3225,2460 3167,2460 3165,2458
VCC_5V0 on Top Layer "VCC_5V0_L01_P000" (solid, remove dead copper, pour order 0): 3105,2458 3117,2446 3117,2274 3116,2273 3044,2273 3020,2297 3020,2457
GND on Bottom Layer "GND_L04_P024" (solid, remove dead copper, pour order 24): 787,275 4505,275 4505,2697 787,2697
LEDK on Bottom Layer "LEDK_L04_P017" (solid, remove dead copper, pour order 17): 3486,1889 3508,1889 3520,1901 3518,1903 3518,2003 3622,2107 3622,2148 3614,2156 3588,2156 3588,2147 3479,2038 3479,1890
VCC_3V3 on Bottom Layer "VCC_3V3_L04_P016" (solid, remove dead copper, pour order 16): 3424,2029 3426,2029 3475,1980 3475,1870 3410,1805 3410,1746 3453,1703 3453,1683 3448,1678 3407,1678 3352,1733 3352,1998 3384,2030
VCC_5V0 on Bottom Layer "VCC_5V0_L04_P014" (solid, remove dead copper, pour order 14): 2574,2258 2731,2258 2736,2263 2735.67,2263.33 2735.67,2401.67 2743,2409 2885,2409 2952,2342 3102,2342 3143,2383 3143,2427 3103,2467 2985,2467 2933,2519 2577,2519
GND on Layer 2 "GND_L02_P022" (solid, remove dead copper, pour order 22): 787,275 4505,275 4505,2697 787,2697
GND on Layer 3 "GND_L03_P023" (solid, remove dead copper, pour order 23): 787,275 4505,275 4505,2697 787,2697

## Other copper
Top Layer:
  pour cut-out: 2875,2455 2836,2455 2836,2480 2875,2480
  pour cut-out: 3019,2507 3018,2506 3018,2493 3057,2493 3057,2507
  pour cut-out: 2802,2345 2802,2295 2803,2294 2821,2294 2821,2346
  pour cut-out: 3359,2478 3255,2374 3255,2289 3283,2289 3285,2287 3285,2387 3361,2387 3434,2314 3436,2316 3436,2551 3413,2574 3359,2574
  pour cut-out: 3488,1668 3486,1666 3486,1559 3509,1559 3513,1555 3513,1608 3558.82,1653.82
  pour cut-out: 3248,1636 3248,1581 3246.42,1579.42 3267.42,1579.42 3318.27,1630.27 3318.27,1730.27 3325.68,1730.27 3410.01,1814.6 3448.7,1814.6 3448.7,1833.88 3449.78,1834.95 3448.7,1836.02 3396.69,1836.02 3396.69,1898.69 3411.96,1913.96 3524.13,1913.96 3547.48,1937.32 3539.94,1944.85 3396.18,1944.85 3364.42,1913.1 3364.42,1806.1 3293.42,1735.1 3293.42,1649.1 3275.32,1631
Bottom Layer:
  pour cut-out: 3480.41,1867.76 3471.22,1858.57 3473.05,1856.74 3473.05,1835.73 3511.27,1835.73 3518,1829 3523.64,1834.64 3546.44,1834.64 3546.44,1918.08 3542.65,1921.87 3538.04,1917.26 3523.41,1917.26 3523.41,1896.76 3507.17,1880.52 3480.41,1880.52
  pour cut-out: 3459.44,1754.87 3501.51,1754.87 3501.51,1826.55 3489.5,1838.56 3462.56,1838.56
  pour cut-out: 3447.45,1654.86 3447.45,1625.11 3455.55,1617 3453.3,1614.75 3428.17,1614.75 3428.17,1652.72 3426.03,1654.86
  pour cut-out: 3385.77,1654.86 3385.77,1570.35 3393.43,1562.69 3418.37,1562.69 3428.17,1572.49 3428.17,1657
Multi-Layer:
  pour cut-out: 4504.72,2206.69 4221.26,2206.69 4221.26,553.15 4504.72,553.15

## Silkscreen, mask and mechanical layers (free items; w line width, h text height)
Top Overlay:
  drawing of 97 lines, arcs and shapes, not listed
  text "5.5 MIPI LCD" at 1433,2417 h60
  text "for EMBEDFIRE" at 1092,1174 h40 r270
Mechanical 1:
  circle w10: c4386.61,393.7 r62.99
  circle w10: c4386.61,2578.74 r62.99
  circle w10: c905.51,393.7 r62.99
  circle w10: c905.51,2578.74 r62.99
  lines w10: 787.4,275.59 787.4,2696.85 4504.72,2696.85 4504.72,2206.69 4221.26,2206.69 4221.26,553.15 4504.72,553.15 4504.72,275.59 787.4,275.59